# Altium PCB Window_shades.PcbDoc
Units mm, origin at the board's own origin, x right, y up, seen from the top; angles counter-clockwise.
Board outline 98 x 50 mm, 2 copper layers (Top Layer, Bottom Layer); 29 components, 39 nets, 166 pads, 21 vias.
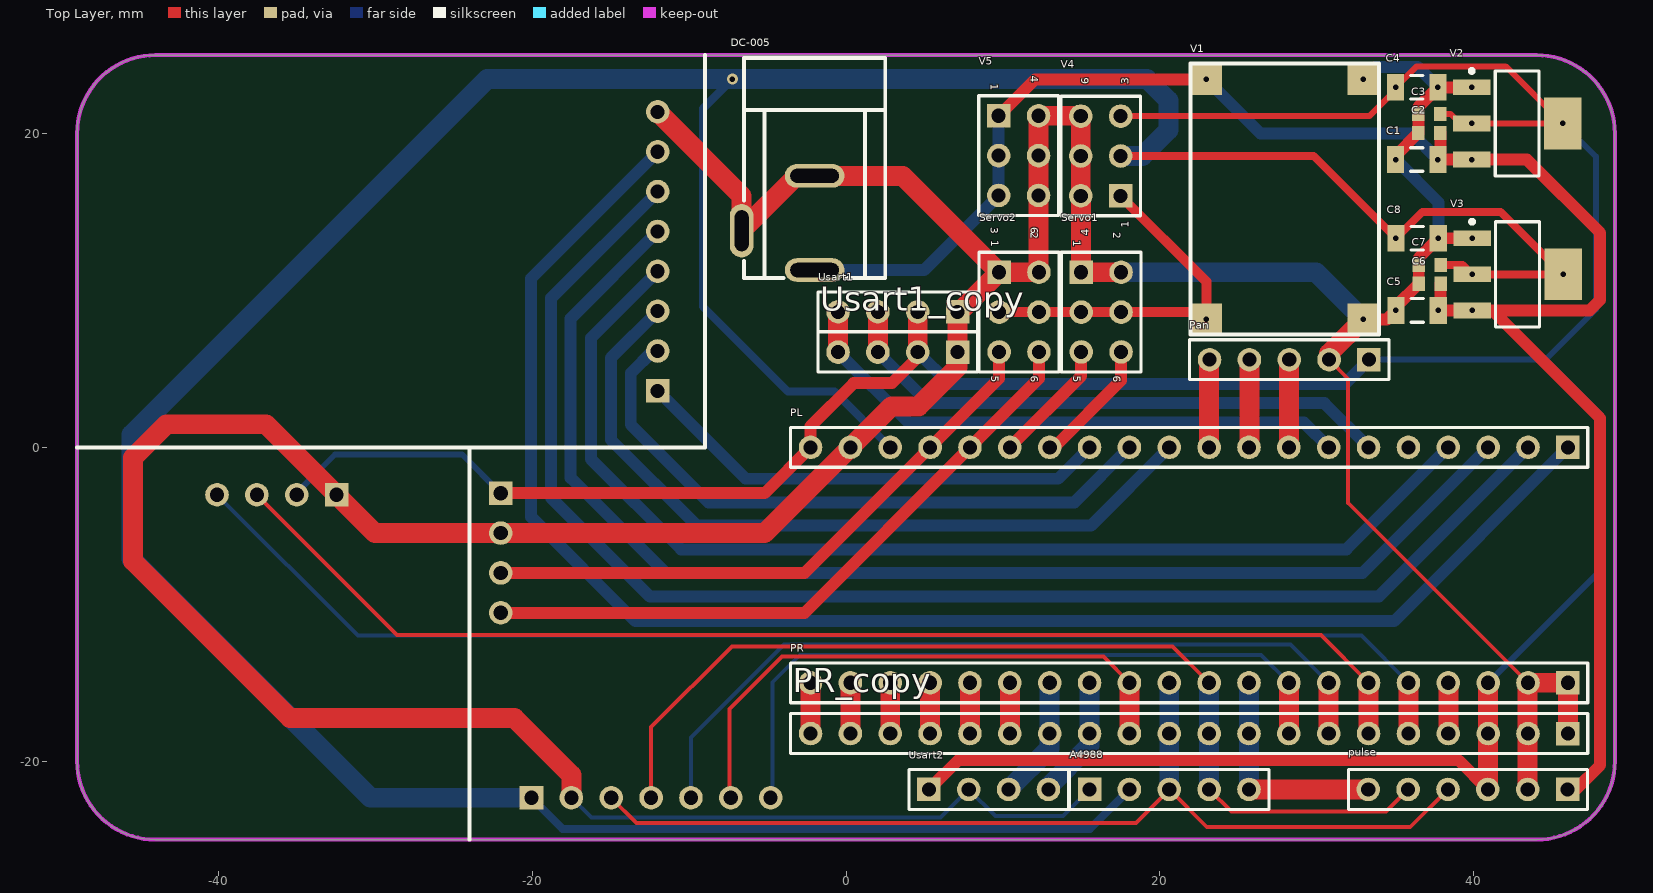
[diagram p0: Top Layer view]
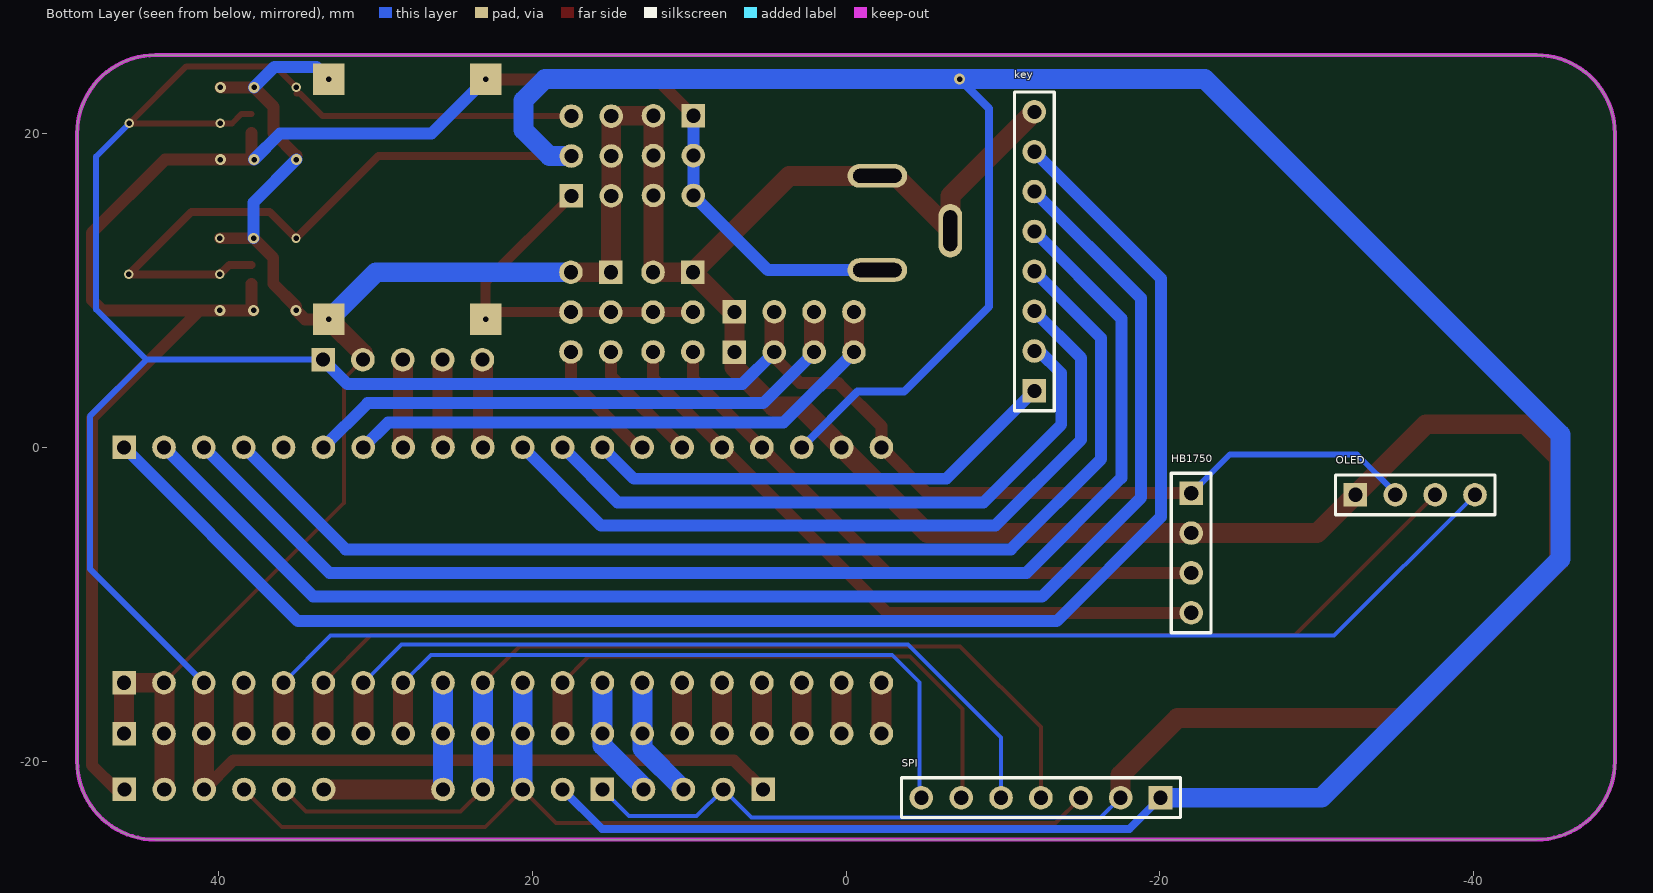
[diagram p1: Bottom Layer view, seen from below]

## Layer stack, top to bottom
Top Solder: solder mask 0.0102, Solder Resist, Dk 3.5
Top Layer: signal copper 0.0356
Dielectric 1: dielectric 0.32, FR-4, Dk 4.8
Bottom Layer: signal copper 0.0356
Bottom Solder: solder mask 0.0102, Solder Resist, Dk 3.5

## Board outline
-49,-20 ccw(c-44,-20) -44,-25 44,-25 ccw(c44,-20) 49,-20 49,20 ccw(c44,20) 44,25 -44,25 ccw(c-44,20) -49,20

## Design rules (kind name [scope] priority, off if disabled: settings)
Clearance [All] p1: gap=0.254 ignorepadtopadclearanceinfootprint=TRUE except(0: Arc-Hole Track-Hole SMDPad-Hole THPad-Hole Via-Hole Fill-Hole Poly-Hole Region-Hole Text-Hole)
ComponentClearance [All] p1: gap=0 collisioncheckmode=3 verticalgap=0 showdistances=FALSE
HoleToHoleClearance [All] p1: gap=0 allowstackedmicrovias=TRUE
MinimumSolderMaskSliver [All] p1: minsoldermaskwidth=0
PolygonConnect [All] p1: connectstyle=Direct reliefconductorwidth=0.254 reliefentries=4 polygonreliefangle="90 Angle" airgapwidth=0.254
RoutingVias [All] p1: holewidth=0.35 width=0.5 viastyle="Through Hole" minholewidth=0.3 minwidth=0.4 maxholewidth=5 maxwidth=10
SilkToSilkClearance [All] p1: silktosilkclearance=0
SilkToSolderMaskClearance [IsPad] p1: minsilkscreentomaskgap=0 clearancetoexposedcopper=TRUE
SolderMaskExpansion [All] p1: expansion=0.102
Width [All] p1: maxlimit=7.62 minlimit=0.254 preferedwidth=0.381
25 further rules are at their usual default settings.

## Components (designator, comment, footprint, x,y, rotation, side; value= is the part's Value field where it differs from the comment)
A4988 "Header 5" HDR1X5 15.52,-21.8 r0 top
C1 "Cap Pol3" C1206 36.371,18.341 r180 top value=10uf
C2 "Cap Semi" 1608[0603] 37.171,20.041 r0 top value=104
C3 "Cap Semi" 1608[0603] 37.171,21.241 r0 top value=104
C4 "Cap Pol3" C1206 36.371,22.941 r0 top value=10uf
C5 "Cap Pol3" C1206 36.397,8.726 r180 top value=10uf
C6 "Cap Semi" 1608[0603] 37.197,10.426 r0 top value=104
C7 "Cap Semi" 1608[0603] 37.197,11.626 r0 top value=104
C8 "Cap Pol3" C1206 36.397,13.326 r0 top value=10uf
DC-005 "DC-005" DC12V -6.651,13.8 r270 top
HB1750 "Header 4" HDR1X4 -22,-2.92 r270 bottom
key "Header 8" HDR1X8 -12,3.6 r90 bottom
OLED "Header 4" HDR1X4 -32.461,-3.023 r180 bottom
Pan "Header 5" HDR1X5 33.325,5.588 r180 top
PL "Header 20" HDR1X20 46,0 r180 top
PR "Header 20" HDR1X20 46,-15 r180 top
PR_copy "Header 20" HDR1X20 45.999,-18.237 r180 top
pulse "Header 6" HDR1X6 45.98,-21.8 r180 top
Servo1 "Header 3X2" HDR2X3 14.987,11.159 r270 top
Servo2 "Header 3X2" HDR2X3 9.755,11.159 r270 top
SPI "Header 7" HDR1X7 -20.041,-22.327 r0 bottom
Usart1 "Header 4" HDR1X4 7.112,8.636 r180 top
Usart1_copy "Header 4" HDR1X4 7.112,6.071 r180 top
Usart2 "Header 4" HDR1X4 5.28,-21.8 r0 top
V1 "LM2596S" MP1584EN 21.962,24.453 r270 top
V2 "AMS1117-3.3" SOT-223(AMS1117-3.3) 42.771,20.641 r270 top
V3 "AMS1117-5" SOT-223(AMS1117-3.3) 42.797,11.026 r270 top
V4 "Header 3X2A" HDR2X3_CEN 17.501,16.027 r90 top
V5 "Header 3X2A" HDR2X3_CEN 9.728,21.133 r270 top

## Footprints (in the part's own frame and the unit in brackets; to place one, negate y for a bottom-side part, rotate by r counter-clockwise, add the part's x,y. Pads: shape width x height; smd on the part's side, far side on the other; paste and mask are expansions set on the pad)
1608[0603] [mm] "Chip Capacitor, Body 1.6x0.8mm, IPC High Density"
  rect 0.8x0.9 smd: 1(-0.7,0) 2(0.7,0)
  body extent -0.87,-0.48 0.87,0.48, height 1.3
C1206 [mm] "Chip Capacitor, Body 3.2x1.6mm, IPC High Density"
  rect 1.1x1.7 smd: 1(-1.35,0) 2(1.35,0)
  silkscreen extent -0.4,-0.75 0.4,0.75, body extent -1.7,-0.9 1.7,0.9, height 1.3
DC12V [mm]
  oval 1.501x3.8 hole 0.899 slot 3.101 at 90 deg mask+0.051: 1(2.499,4.651) 2(-3.5,4.651)
  oval 3.401x1.501 hole 0.899 slot 2.601 at 0 deg mask+0.051: 3(0,0)
  silkscreen extent -11,0.15 3,9.15
HDR1X4 [mm] "Connector; Header; 4 Position"
  rect 1.5x1.5 hole 0.9: 1(0,0)
  round 1.5 hole 0.9: 2(2.54,0) 3(5.08,0) 4(7.62,0)
  silkscreen extent -1.27,-1.27 8.89,1.27
HDR1X5 [mm] "Connector; Header; 5 Position"
  rect 1.5x1.5 hole 0.9: 1(0,0)
  round 1.5 hole 0.9: 2(2.54,0) 3(5.08,0) 4(7.62,0) 5(10.16,0)
  silkscreen extent -1.27,-1.27 11.43,1.27
HDR1X6 [mm] "Connector; Header; 6 Position"
  rect 1.5x1.5 hole 0.9: 1(0,0)
  round 1.5 hole 0.9: 2(2.54,0) 3(5.08,0) 4(7.62,0) 5(10.16,0) 6(12.7,0)
  silkscreen extent -1.27,-1.27 13.97,1.27
HDR1X7 [mm] "Connector; Header; 7 Position"
  rect 1.5x1.5 hole 0.9: 1(0,0)
  round 1.5 hole 0.9: 2(2.54,0) 3(5.08,0) 4(7.62,0) 5(10.16,0) 6(12.7,0) 7(15.24,0)
  silkscreen extent -1.27,-1.27 16.51,1.27
HDR1X8 [mm] "Connector; Header; 8 Position"
  rect 1.5x1.5 hole 0.9: 1(0,0)
  round 1.5 hole 0.9: 2(2.54,0) 3(5.08,0) 4(7.62,0) 5(10.16,0) 6(12.7,0) 7(15.24,0) 8(17.78,0)
  silkscreen extent -1.27,-1.27 19.05,1.27
HDR1X20 [mm] "Connector; Header; 20 Position"
  rect 1.5x1.5 hole 0.9: 1(0,0)
  round 1.5 hole 0.9: 2(2.54,0) 3(5.08,0) 4(7.62,0) 5(10.16,0) 6(12.7,0) 7(15.24,0) 8(17.78,0) 9(20.32,0) 10(22.86,0) 11(25.4,0) 12(27.94,0) 13(30.48,0) 14(33.02,0) 15(35.56,0) 16(38.1,0) 17(40.64,0) 18(43.18,0) 19(45.72,0) 20(48.26,0)
  silkscreen extent -1.27,-1.27 49.53,1.27
HDR2X3 [mm] "Connector; Header; 3x2 Position"
  rect 1.5x1.5 hole 0.9: 1(0,0)
  round 1.5 hole 0.9: 2(0,2.54) 3(2.54,0) 4(2.54,2.54) 5(5.08,0) 6(5.08,2.54)
  silkscreen extent -1.27,-1.27 6.35,3.81
HDR2X3_CEN [mm] "Connector; Header; 3x2 Position"
  rect 1.5x1.5 hole 0.9: 1(0,0)
  round 1.5 hole 0.9: 2(2.54,0) 3(5.08,0) 4(0,2.54) 5(2.54,2.54) 6(5.08,2.54)
  silkscreen extent -1.27,-1.27 6.35,3.81
MP1584EN [mm]
  rect 2x2 all layers, no hole: 1(1,11) 2(1,1) 3(16.3,11) 4(16.3,1)
  silkscreen extent 0,0 17.27,12
SOT-223(AMS1117-3.3) [mm]
  rect 1x2.4 smd: 1(-2.3,-2.9) 2(0,-2.9) 3(2.3,-2.9)
  rect 3.3x2.4 smd: 4(0,2.9)
  silkscreen extent -3.47,-3.02 3.35,1.4, body extent -3.25,-3.48 3.25,3.48, height 1.7

## Part data
A4988 Pan: "Header, 5-Pin", LatestRevisionDate=17-Jul-2002, LatestRevisionNote="Re-released for DXP Platform.", Publisher="Altium Limited"
C1 C4 C5 C8: "Polarized Capacitor (Surface Mount)", LatestRevisionDate=29-May-2009, LatestRevisionNote="IPC-7351 Footprint Added.", PackageDescription="Chip Capacitor", PackageReference=C0805, Published=8-Jun-2000, Publisher="Altium Limited"
C2 C3 C6 C7: "Capacitor (Semiconductor SIM Model)", LatestRevisionDate=29-May-2009, LatestRevisionNote="IPC-7351 Footprint Added.", PackageDescription="Chip Capacitor", PackageReference=C1206, Published=8-Jun-2000, Publisher="Altium Limited"
DC-005: library part "Header 3", "Header, 3-Pin", LatestRevisionDate=17-Jul-2002, LatestRevisionNote="Re-released for DXP Platform.", Publisher="Altium Limited"
HB1750 OLED Usart1 Usart1_copy Usart2: "Header, 4-Pin", LatestRevisionDate=17-Jul-2002, LatestRevisionNote="Re-released for DXP Platform.", Publisher="Altium Limited"
key: "Header, 8-Pin", LatestRevisionDate=17-Jul-2002, LatestRevisionNote="Re-released for DXP Platform.", Publisher="Altium Limited"
PL PR PR_copy: "Header, 20-Pin", LatestRevisionDate=17-Jul-2002, LatestRevisionNote="Re-released for DXP Platform.", Publisher="Altium Limited"
pulse: "Header, 6-Pin", LatestRevisionDate=17-Jul-2002, LatestRevisionNote="Re-released for DXP Platform.", Publisher="Altium Limited"
Servo1 Servo2 V4 V5: "Header, 3-Pin, Dual row", LatestRevisionDate=17-Jul-2002, LatestRevisionNote="Re-released for DXP Platform.", Publisher="Altium Limited"
SPI: "Header, 7-Pin", LatestRevisionDate=17-Jul-2002, LatestRevisionNote="Re-released for DXP Platform.", Publisher="Altium Limited"
V3: library part AMS1117-3.3

## Via types
v1: diameter 0.7, hole 0.35, Top Layer to Bottom Layer, tented both sides, 12 vias
v2: diameter 0.6, hole 0.35, Top Layer to Bottom Layer, tented both sides, 9 vias

## Nets (pads, with @x,y where several pads share a name; then routed paths per layer and width w, separated by ;. In a path a pad name is that pad's centre, name@x,y a point inside that pad or via, vN(x,y) a via of type N, cw(c..) or ccw(c..) an arc to the next point about the centre after c; other vN are vias at no path point)
GND: A4988.1 C1.2 C2.1 C3.1 C4.2 C5.2 C6.1 C7.1 C8.2 DC-005.2 DC-005.3 HB1750.2 key.8 OLED.1 Pan.2 PL.19 PR.1 PR.2 PR_copy.1 PR_copy.2 pulse.2 Servo1.1 Servo1.2 Servo2.1 Servo2.2 SPI.2 Usart1.1 Usart1_copy.1 Usart2.2 V1.1 V1.3 V2.1 V3.1 V4.4 V4.5 V4.6 V5.4 V5.5 V5.6 | length 291.9
  Top Layer w0.254: Pan.2 32.004,4.369 32.004,-3.544 PR.2
  Top Layer w0.762: v1(32.962,8.153) 34.474,8.153 v1(35.047,8.726) ; C1.2@35.021,18.591 C2.1 C3.1 36.471,21.691 v1(37.721,22.941) v1(39.871,22.941) ; C5.2@35.047,8.976 C6.1 C7.1 36.497,12.076 v1(37.747,13.326) v2(39.897,13.326)
  Top Layer w1.27: SPI.2 -17.501,-20.879 -21.133,-17.247 -35.433,-17.247 -45.441,-7.239 -45.441,-0.66 -43.307,1.473 -36.957,1.473 OLED.1 -30.024,-5.46 HB1750.2 -5.18,-5.46 PL.19 2.896,2.616 4.623,2.616 7.112,5.105 Usart1_copy.1 Usart1.1 7.232,8.636 Servo2.1 ; key.8 -6.651,16.031 DC-005.3 -3.151,17.3 DC-005.2 3.614,17.3 Servo2.1 ; Servo2.2@12.067,11.159 Servo2.1 ; Servo2.2 12.268,11.186 V5.6 V5.5 V5.4 14.935,21.133 V4.6 V4.5 V4.4 14.987,16.001 Servo1.1 Servo1.2 ; Pan.2 30.785,5.977 v1(32.962,8.153) ; pulse.2 PR.2@43.44,-15 ; PR.2 PR.1 PR_copy.1
  Bottom Layer w0.254: SPI.2 -16.231,-23.597 6.023,-23.597 Usart2.2 9.515,-23.495 13.825,-23.495 A4988.1 ; DC-005.2@-3.151,17.3 DC-005.2
  Bottom Layer w0.762: v1(32.962,23.453) 33.746,24.238 36.424,24.238 v1(37.721,22.941) ; v1(35.021,18.341) 37.747,15.616 v1(37.747,13.326)
  Bottom Layer w1.27: Servo1.2 29.956,11.159 v1(32.962,8.153)
PA0: PR.16 PR_copy.16 | length 3.2
  Top Layer w1.27: PR_copy.16 PR.16
PA1: PR.15 PR_copy.15 | length 3.2
  Top Layer w1.27: PR_copy.15 PR.15
PA2: PR.14 PR_copy.14 Usart2.3 | length 7.9
  Bottom Layer w1.27: Usart2.3 12.98,-19.18 PR.14
PA3: PR.13 PR_copy.13 Usart2.4 | length 7.9
  Bottom Layer w0.254: Usart2.4 Usart2.4@12.9,-21.62
  Bottom Layer w1.27: Usart2.4@12.9,-21.62 15.52,-19 PR.13
PA4: PR.12 PR_copy.12 SPI.6 | length 35.8
  Top Layer w0.254: SPI.6@-7.417,-21.641 -7.417,-16.662 -4.089,-13.335 16.395,-13.335 PR.12
  Top Layer w1.27: PR_copy.12 PR.12
PA5: A4988.3 PR.11 PR_copy.11 pulse.4 SPI.3 | length 63.7
  Top Layer w0.254: SPI.3 -13.36,-23.927 18.473,-23.927 A4988.3 23.006,-24.206 35.954,-24.206 pulse.4
  Bottom Layer w1.27: A4988.3 PR.11
PA6: A4988.4 PR.10 PR_copy.10 pulse.5 SPI.4 | length 63.8
  Top Layer w0.254: SPI.4 -12.421,-17.831 -7.264,-12.675 20.815,-12.675 PR.10 ; A4988.4 24.556,-23.216 34.404,-23.216 pulse.5
  Bottom Layer w1.27: A4988.4 PR.10
PA7: A4988.5 PR.9 PR_copy.9 pulse.6 | length 14.4
  Top Layer w1.27: A4988.5 pulse.6
  Bottom Layer w1.27: A4988.5 PR.9
PA8: PL.5
PA9: PL.6 Usart1.3 Usart1_copy.3 | length 36.3
  Top Layer w1.27: Usart1_copy.3 Usart1.3
  Bottom Layer w0.762: Usart1_copy.3 5.283,2.819 30.481,2.819 PL.6
PA10: PL.7 Usart1.4 Usart1_copy.4 | length 36.3
  Top Layer w1.27: Usart1_copy.4 Usart1.4
  Bottom Layer w0.762: Usart1_copy.4 3.988,1.575 29.185,1.575 PL.7
PA11: Pan.3 PL.8 | length 5.6
  Top Layer w0.254: Pan.3@28.22,5.563 Pan.3
  Top Layer w1.27: PL.8 Pan.3@28.22,5.563
PA12: Pan.4 PL.9 | length 5.6
  Top Layer w1.27: PL.9@25.705,0 Pan.4
PA15: Pan.5 PL.10 | length 5.6
  Top Layer w0.254: Pan.5@23.14,5.563 Pan.5
  Top Layer w1.27: PL.10 Pan.5@23.14,5.563
PB0: PR.8 PR_copy.8 SPI.7 | length 45
  Top Layer w1.27: PR_copy.8 PR.8
  Bottom Layer w0.254: SPI.7@-4.877,-22.327 -4.699,-22.149 -4.699,-14.986 -2.946,-13.233 26.453,-13.233 PR.8
PB1: PR.7 PR_copy.7 SPI.5 | length 51.2
  Top Layer w1.27: PR_copy.7 PR.7
  Bottom Layer w0.254: SPI.5 -9.881,-18.491 -3.962,-12.573 28.333,-12.573 PR.7
PB3: key.3 PL.11 | length 49.3
  Bottom Layer w0.762: key.3 -14.986,5.694 -14.986,0.486 -9.522,-4.978 15.622,-4.978 PL.11
PB4: key.2 PL.12 | length 40.9
  Bottom Layer w0.762: key.2 -12.3,6.14 -13.716,4.724 -13.716,1.448 -8.768,-3.5 14.56,-3.5 PL.12
PB5: key.1 PL.13 | length 30.7
  Bottom Layer w0.762: key.1 -6.4,-2 13.52,-2 PL.13
PB6: PL.14 Servo1.6 | length 8.1
  Top Layer w0.254: PL.14 PL.14@13.259,0
  Top Layer w0.762: PL.14@13.259,0 17.527,4.268 Servo1.6
PB7: PL.15 Servo1.5 | length 8
  Top Layer w0.762: PL.15 14.987,4.547 Servo1.5
PB8: HB1750.4 PL.16 Servo2.6 | length 42.2
  Top Layer w0.762: HB1750.4 -2.64,-10.54 PL.16 12.295,4.395 Servo2.6
PB9: HB1750.3 PL.17 Servo2.5 | length 38.6
  Top Layer w0.762: HB1750.3 -2.64,-8 PL.17 9.755,4.395 Servo2.5
PB10: OLED.3 PR.6 PR_copy.6 | length 79.7
  Top Layer w0.254: OLED.3@-37.795,-3.277 OLED.3@-37.541,-3.531 ; OLED.3@-37.541,-3.327 OLED.3 -28.6,-11.963 30.263,-11.963 PR.6
  Top Layer w1.27: PR_copy.6 PR.6
PB11: OLED.4 PR.5 PR_copy.5 | length 84.1
  Top Layer w1.27: PR_copy.5 PR.5
  Bottom Layer w0.254: OLED.4 -31.104,-12 32.84,-12 PR.5
PB12: key.7 PL.1 | length 100
  Bottom Layer w0.762: key.7 -20.066,10.774 -20.066,-4.434 -13.426,-11.074 34.926,-11.074 PL.1
PB13: key.6 PL.2 | length 91.1
  Bottom Layer w0.762: key.6 -18.796,9.504 -18.796,-3.204 -12.5,-9.5 33.96,-9.5 PL.2
PB14: key.5 PL.3 | length 82.3
  Bottom Layer w0.762: key.5 -17.551,8.209 -17.551,-1.949 -11.5,-8 32.92,-8 PL.3
PB15: key.4 PL.4 | length 73.4
  Bottom Layer w0.762: key.4 -16.256,6.964 -16.256,-0.744 -10.5,-6.5 31.88,-6.5 PL.4
PC13: PR.19 PR_copy.19 | length 3.2
  Top Layer w1.27: PR_copy.19 PR.19
PC14: PR.18 PR_copy.18 | length 3.2
  Top Layer w1.27: PR_copy.18 PR.18
PC15: PR.17 PR_copy.17 | length 3.2
  Top Layer w1.27: PR_copy.17 PR.17
RST: PR.4 PR_copy.4 | length 3.2
  Top Layer w1.27: PR_copy.4 PR.4
VBT: PR.20 PR_copy.20 | length 3.2
  Top Layer w1.27: PR_copy.20 PR.20
VCC_3.3V: C3.2 C4.1 HB1750.1 OLED.2 Pan.1 PL.20 PR.3 PR_copy.3 pulse.3 Usart1.2 Usart1_copy.2 Usart2.1 V2.2 V2.4 V4.3 | length 215.9
  Top Layer w0.381: Usart1_copy.2@4.572,5.74 Usart1_copy.2 ; V4.3 33.35,21.107 34.785,22.543 C4.1@35.014,22.543 ; v2(35.021,22.941) 36.362,24.282 42.03,24.282 v2(45.671,20.641) v2(39.871,20.641) 39.125,20.641 38.525,21.241 C3.2 ; PR.3@40.9,-15.02 PR.3
  Top Layer w0.762: HB1750.1 -5.18,-2.92 PL.20 -2.26,1.347 0.483,4.089 2.921,4.089 Usart1_copy.2@4.572,5.74 ; Usart2.1 7.141,-19.939 39.039,-19.939 pulse.3
  Top Layer w1.27: Usart1_copy.2 Usart1.2 ; pulse.3 PR.3@40.9,-15.02
  Bottom Layer w0.381: OLED.2@-35.027,-3.251 -35.027,-2.921 -32.563,-0.457 -24.463,-0.457 HB1750.1 ; Pan.1 44.577,5.588 ; PR.3 48.184,-7.736 48.184,1.981 44.577,5.588 ; v2(45.671,20.641) 47.777,18.535 47.777,8.788 44.577,5.588
  Bottom Layer w0.762: Usart1_copy.2 6.604,4.039 31.775,4.039 Pan.1
VCC_5V: A4988.2 C7.2 C8.1 PL.18 SPI.1 V3.2 V3.4 V4.2 | length 233.2
  Top Layer w0.254: v2(39.897,11.026) V3.2@39.897,11.257
  Top Layer w0.508: V4.2 29.805,18.567 v2(35.047,13.326) 36.732,15.011 41.711,15.011 v2(45.697,11.026) v2(39.897,11.026) 39.297,11.626 C7.2
  Bottom Layer w0.508: SPI.1 -18.059,-24.308 15.552,-24.308 A4988.2 ; v1(-7.239,23.47) -9.119,21.59 -9.119,8.966 -3.708,3.556 -0.736,3.556 PL.18
  Bottom Layer w1.27: SPI.1 -30.302,-22.327 -45.517,-7.112 -45.517,0.813 -22.86,23.47 v1(-7.239,23.47) 19.177,23.47 20.549,22.098 20.549,20.218 18.898,18.567 V4.2
VCC_7.4V: Servo1.3 Servo1.4 Servo2.3 Servo2.4 V1.4 V4.1 | length 23.5
  Top Layer w0.254: V1.4@22.496,8.619 v2(22.962,8.153)
  Top Layer w0.635: Servo2.3@9.527,8.619 Servo2.3 Servo2.4@12.067,8.619 ; Servo2.4 Servo1.3 Servo1.4 V1.4@22.496,8.619 ; V4.1 22.962,10.566 v2(22.962,8.153)
VCC_12V: C1.1 C2.2 C5.1 C6.2 DC-005.1 pulse.1 V1.2 V2.3 V3.3 V5.1 V5.2 V5.3 | length 116.3
  Top Layer w0.254: v1(37.721,18.341) C1.1@37.871,18.491 ; v1(37.747,8.726) C5.1@37.897,8.876 ; V3.3@39.868,8.697 41.214,8.697 ; pulse.1 pulse.1@46.501,-21.8
  Top Layer w0.762: V5.1 12.049,23.453 v2(22.962,23.453) ; v1(37.721,18.341) v1(39.871,18.341) 43.381,18.341 48.057,13.665 48.057,9.398 47.384,8.726 v1(37.747,8.726) ; C1.1@37.871,18.491 C2.2 ; C5.1@37.897,8.876 C6.2 ; 41.214,8.697 48.057,1.854 48.057,-20.244 pulse.1@46.501,-21.8
  Bottom Layer w0.762: DC-005.1 4.976,11.301 V5.3 V5.2 V5.1 ; v2(22.962,23.453) 26.425,19.99 36.073,19.99 v1(37.721,18.341)
  other v1: 39.897,8.726

## Keep-outs
Keep-Out Layer:
  the board outline again, w0.254

## Silkscreen, mask and mechanical layers (free items; w line width, h text height)
Top Overlay:
  lines w0.254: -49,0 -9,0 -9,25 ; -24,-25 -24,0

## Text inside footprints (layer, text, board x,y; h text height)
Servo1: Top Overlay "1" at 14.479,13.191 h0.5 r270; Top Overlay "2" at 17.019,13.699 h0.5 r270; Top Overlay "5" at 14.479,4.555 h0.5 r270; Top Overlay "6" at 17.019,4.555 h0.5 r270
Servo2: Top Overlay "1" at 9.247,13.191 h0.5 r270; Top Overlay "2" at 11.787,13.699 h0.5 r270; Top Overlay "5" at 9.247,4.555 h0.5 r270; Top Overlay "6" at 11.787,4.555 h0.5 r270
V4: Top Overlay "6" at 15.469,23.139 h0.5 r90; Top Overlay "3" at 18.009,23.139 h0.5 r90; Top Overlay "1" at 18.009,13.995 h0.5 r90; Top Overlay "4" at 15.469,13.487 h0.5 r90
V5: Top Overlay "6" at 11.76,14.021 h0.5 r270; Top Overlay "3" at 9.22,14.021 h0.5 r270; Top Overlay "1" at 9.22,23.165 h0.5 r270; Top Overlay "4" at 11.76,23.673 h0.5 r270